# Altium PCB dsPIC33_CPU_ETH_Unit_QFN_ETH.PcbDoc
Units mm, origin at the board's own origin, x right, y up, seen from the top; angles counter-clockwise.
Board outline 83.82 x 124.46 mm, 3 copper layers (Top Layer, Internal Plane 1, Bottom Layer); 40 components, 103 nets, 313 pads, 156 vias.
Unrouted connection lines stored in the file: 4.
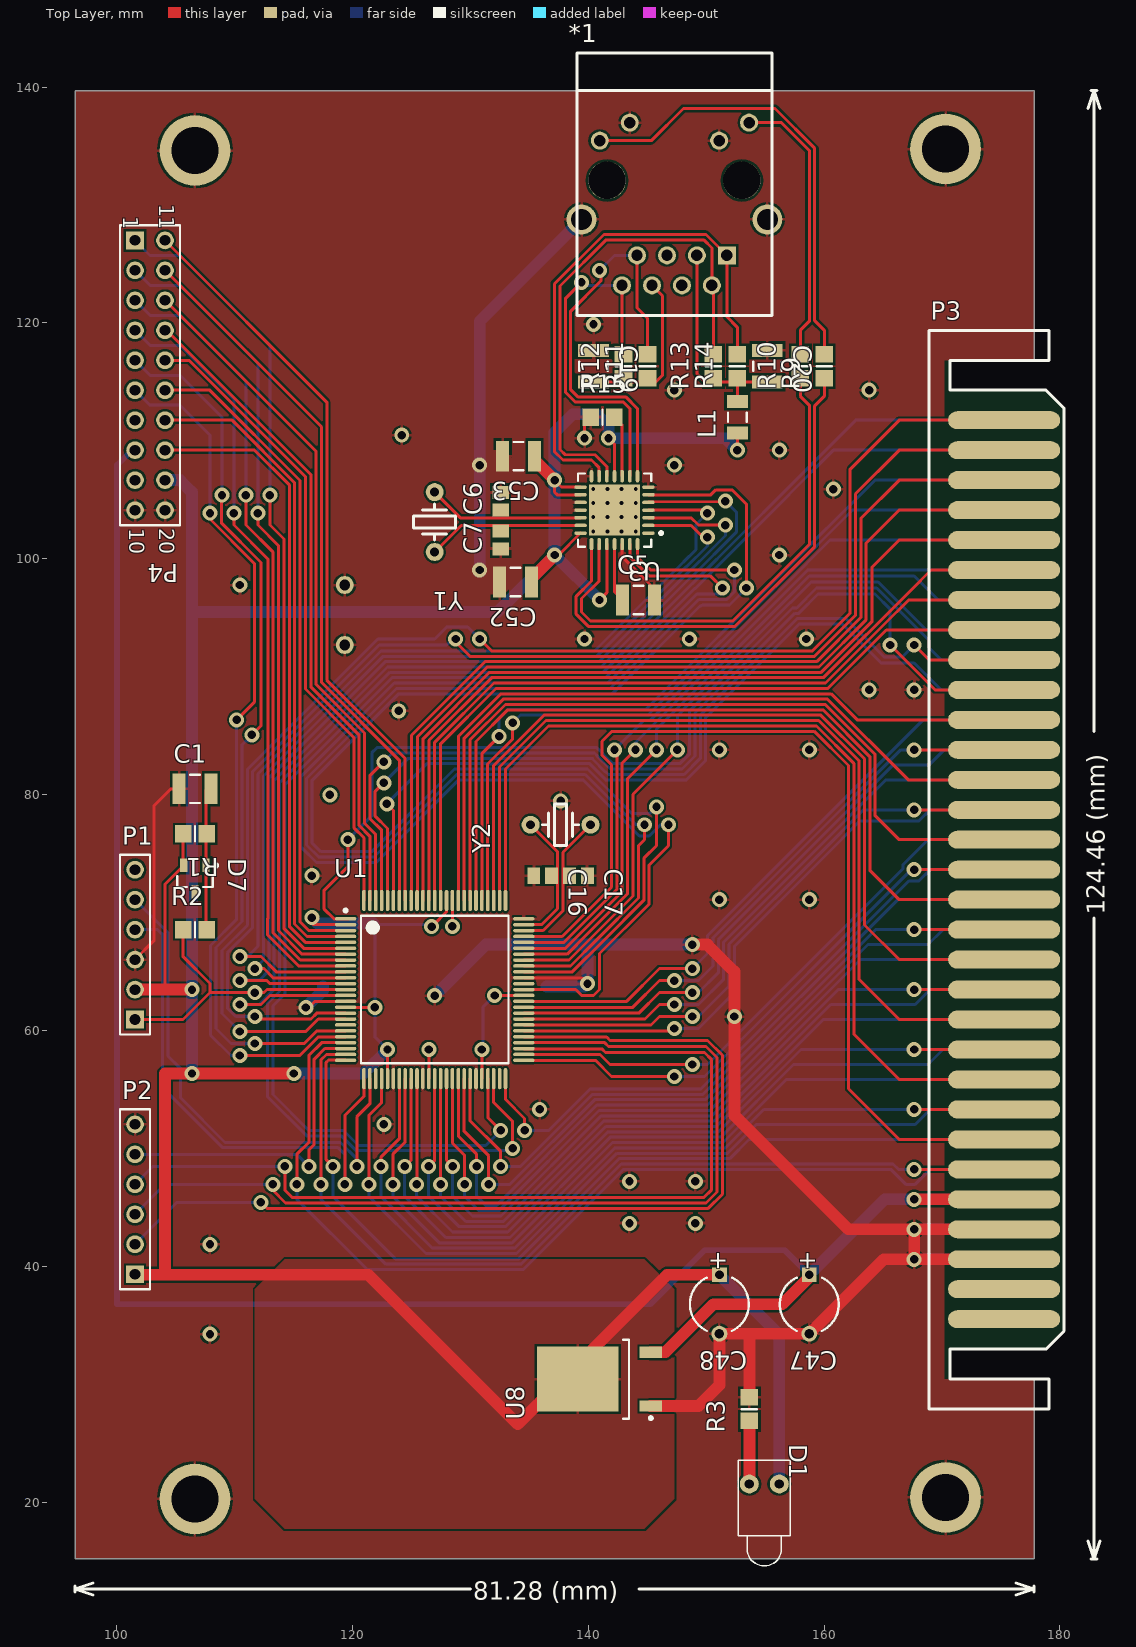
[diagram p0: Top Layer view]
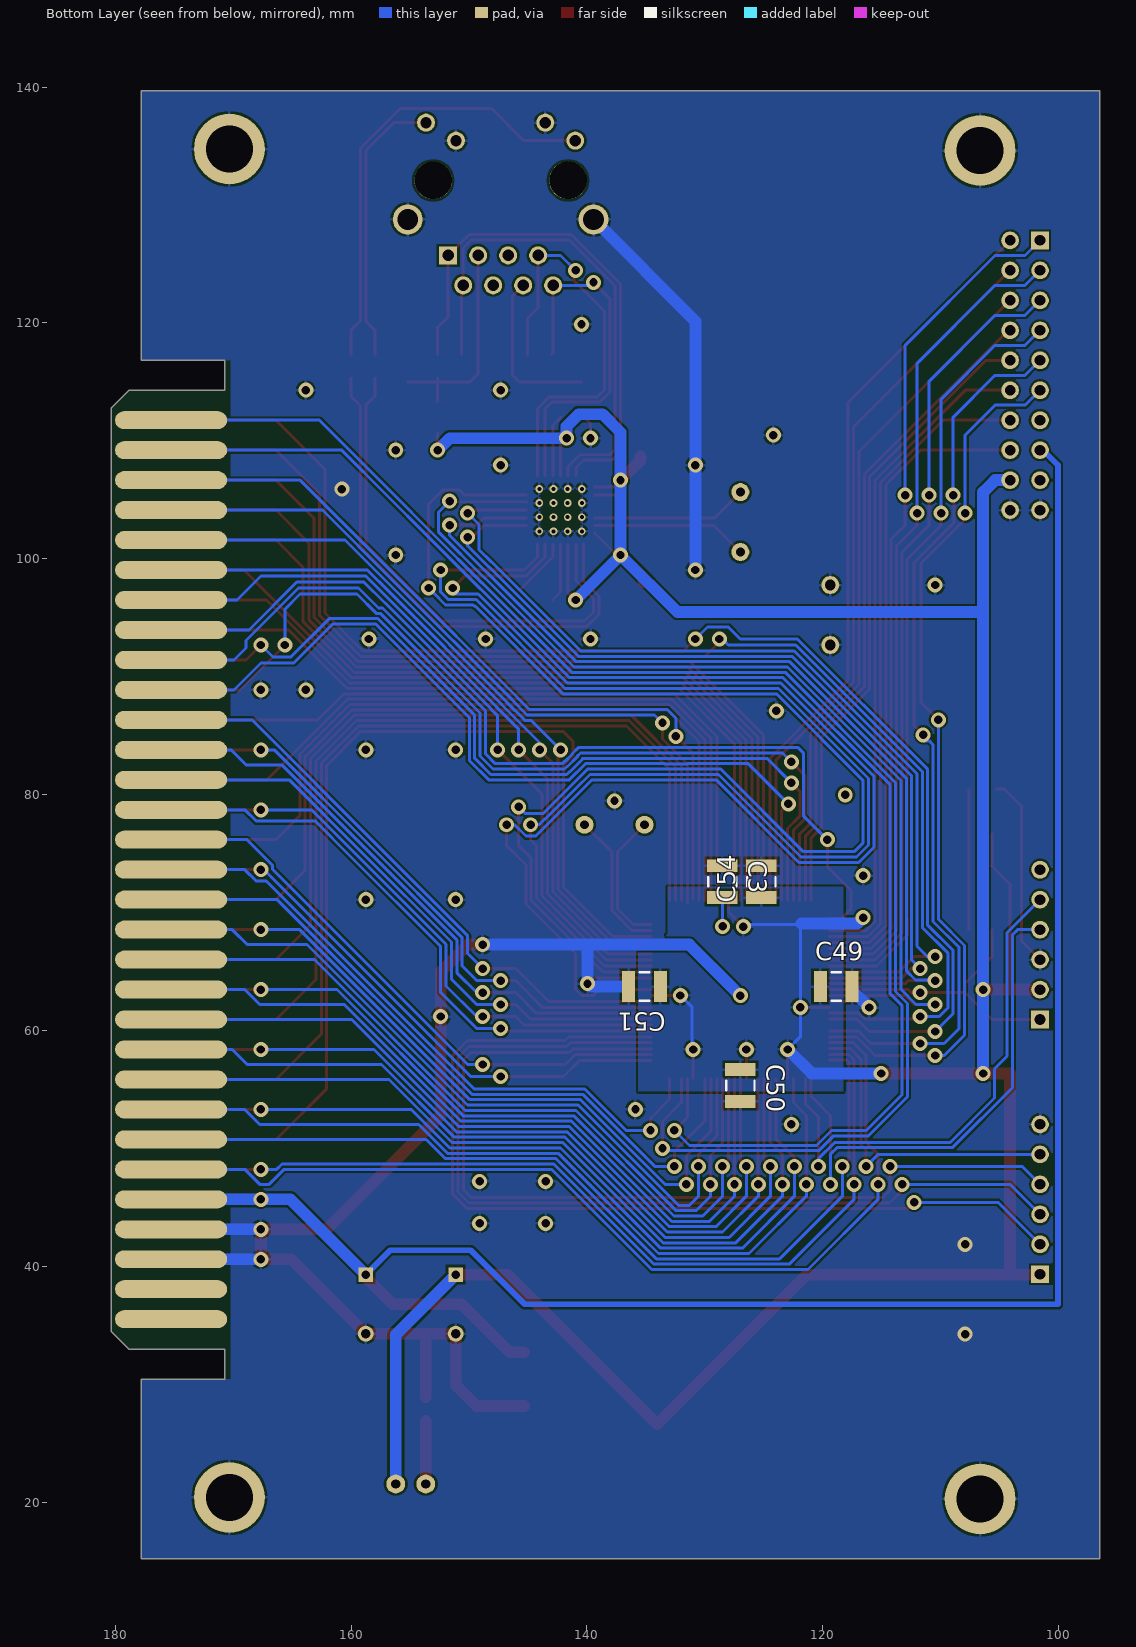
[diagram p1: Bottom Layer view, seen from below]
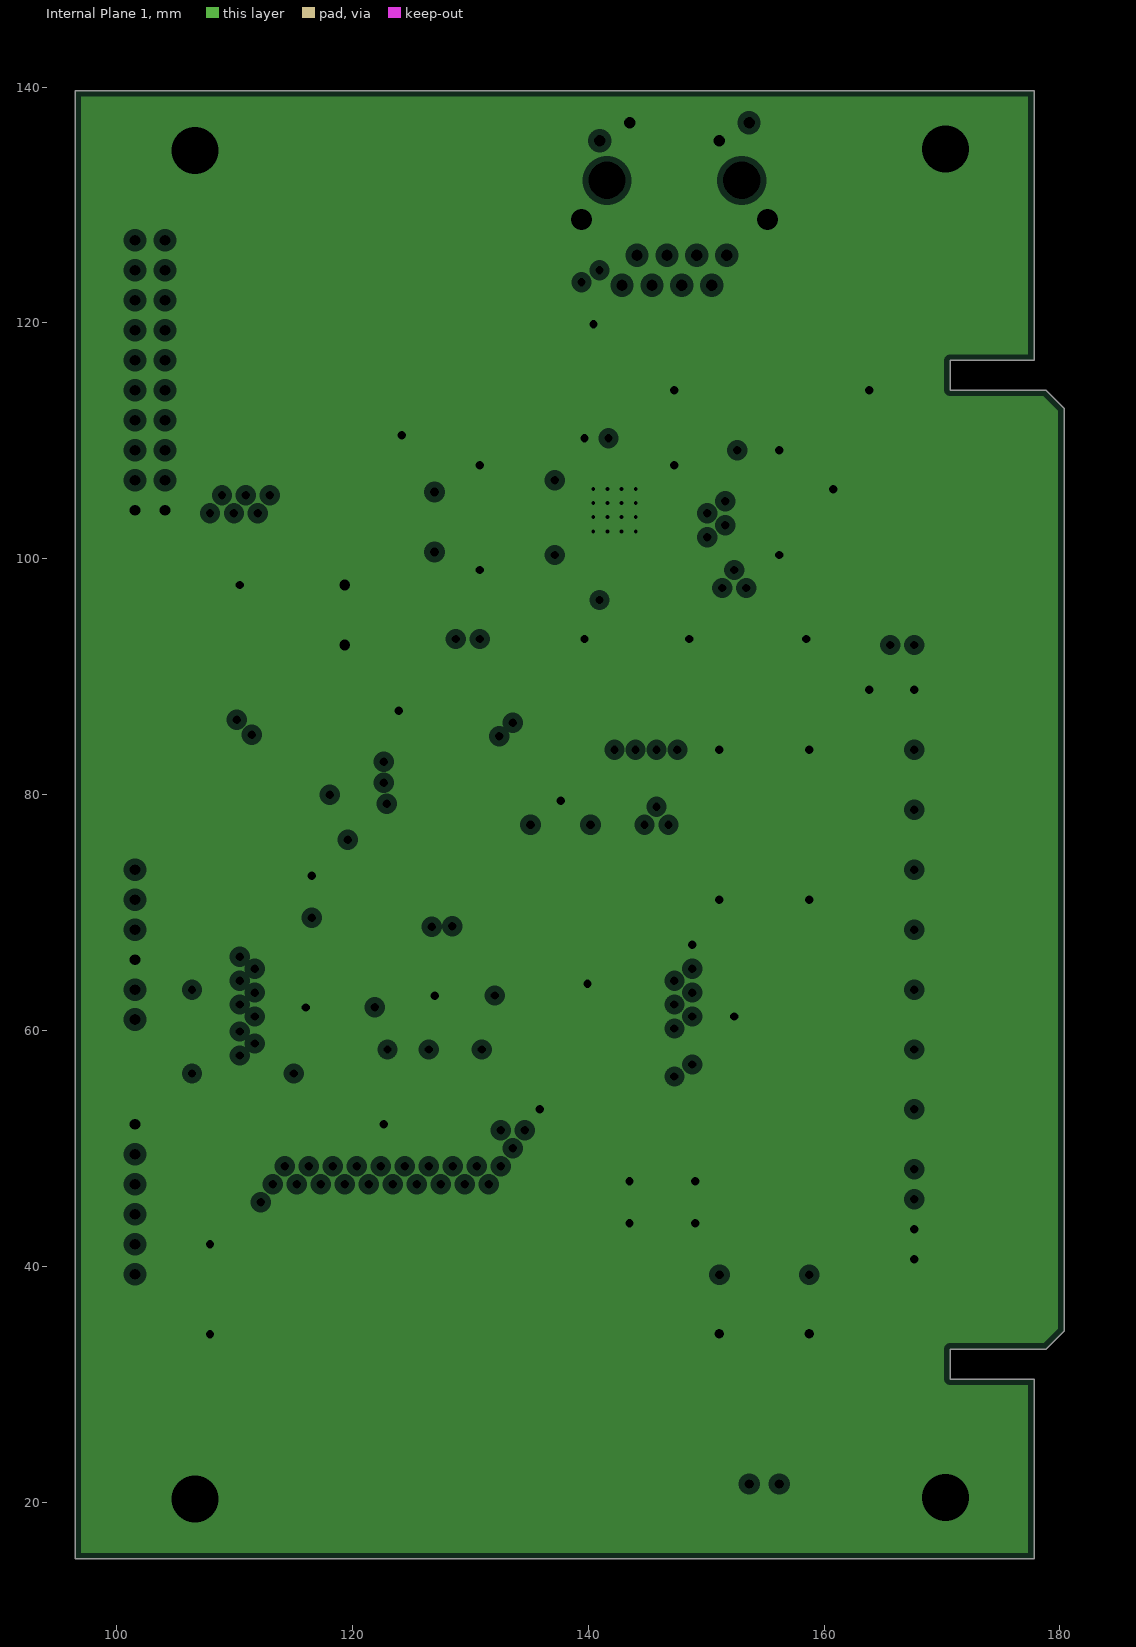
[diagram p2: Internal Plane 1, clearances drawn from the general rule]

## Layer stack, top to bottom
Top Layer: signal copper 0.0356
Dielectric: core 0.32, FR-4, Dk 4.8
Internal Plane 1: plane copper 0.0356, net GND
Dielectric: prepreg 0.32, FR-4, Dk 4.8
Bottom Layer: signal copper 0.0356

## Board outline
177.8,139.7 177.8,116.84 170.688,116.84 170.688,114.3 178.816,114.3 180.34,112.776 180.34,34.544 178.816,33.02 170.688,33.02 170.688,30.48 177.8,30.48 177.8,15.24 96.52,15.24 96.52,139.7

## Design rules (kind name [scope] priority, off if disabled: settings)
Clearance [All] p1: gap=0.2
PlaneClearance [All] p1: clearance=0.508
PlaneConnect [All] p1: planeconnectstyle=Relief reliefexpansion=0.508 reliefentries=4 reliefconductorwidth=0.254 reliefairgap=0.254
PolygonConnect [All] p1: connectstyle=Relief reliefconductorwidth=0.254 reliefentries=4 polygonreliefangle="90 Angle"
RoomDefinition dsPIC33_CPU_ETH_Unit [All] p1: confinementstyle=ConfineIn formatcopy=TRUE lockcomponents=FALSE outline 96.52,144.78 182.88,144.78 182.88,12.7 96.52,12.7
RoutingVias [All] p1: holewidth=0.711 width=1.27 viastyle="Through Hole" minholewidth=0.3 minwidth=0.8 maxholewidth=0.711 maxwidth=1.27
SMDNeckDown [All] p1: percent=200.000
SilkscreenOverComponentPads [All] p1: minsilkscreentomaskgap=0.254
SolderMaskExpansion [All] p1: expansion=0.102
Width [All] p1: maxlimit=1 minlimit=0.15 preferedwidth=0.254
25 further rules are at their usual default settings.

## Components (designator, comment, footprint, x,y, rotation, side; value= is the part's Value field where it differs from the comment)
*1 "LU1T516-43" EthernetCON 147.32,132.08 r90 top
C1 "Cap" CAPC3225L 106.68,80.518 r0 top
C3 "Cap" CAPC3225L 128.524,72.644 r270 bottom
C5 "Cap" CAPC3225L 144.272,96.52 r0 top
C6 "Cap" CAPC2012L 132.588,104.902 r90 top
C7 "Cap" CAPC2012L 132.588,101.6 r90 top
C16 "Cap" CAPC2012L 136.144,73.152 r0 top
C17 "Cap" CAPC2012L 139.192,73.152 r0 top
C19 "Cap" CAPC3225L 140.462,116.332 r270 top
C20 "Cap" CAPC3225L 155.194,116.332 r270 top
C47 "Cap Pol1" CAPPR5-5x5 158.75,36.83 r270 top
C48 "Cap Pol1" CAPPR5-5x5 151.13,36.83 r270 top
C49 "Cap" CAPC3225L 118.872,63.754 r180 bottom
C50 "Cap" CAPC3225L 127,55.372 r270 bottom
C51 "Cap" CAPC3225L 135.128,63.754 r0 bottom
C52 "Cap" CAPC3225L 133.858,98.044 r180 top
C53 "Cap" CAPC3225L 134.112,108.712 r180 top
C54 "Cap" CAPC3225L 125.222,72.644 r90 bottom
D1 "LED1" LED-1 154.94,21.59 r270 top
D7 "Diode" SOT95P240-3N 106.68,72.898 r270 top
L1 "Inductor" INDC3216AL 152.654,112.014 r90 top
P1 "Программатор" HDR1X6 101.6,60.96 r90 top
P2 "SPI" HDR1X6 101.6,39.37 r90 top
P3 "31x2 Slot" SL-62 180.34,33.02 r90 top
P4 "Header 10X2A" HDR2X10_CEN 101.6,127 r270 top
R1 "Res2" RESC2012M 106.68,76.708 r180 top
R2 "Res2" RESC2012M 106.68,68.58 r0 top
R3 "Res2" RESC2012M 153.67,27.94 r90 top
R9 "Res2" RESC2012M 160.02,116.332 r90 top
R10 "Res2" RESC2012M 157.988,116.332 r90 top
R11 "Res2" RESC2012M 145.034,116.332 r90 top
R12 "Res2" RESC2012M 143.002,116.332 r90 top
R13 "Res2" RESC2012M 150.622,116.332 r90 top
R14 "Res2" RESC2012M 152.654,116.332 r90 top
R15 "Res2" RESC2012M 141.224,112.014 r0 top
U1 "DSPIC33FJ256MC710T-I/PF" TQFP-PF100_N 127,63.5 r0 top
U3 "ENC28J60-I/ML" QFN-ML28_N 142.24,104.14 r180 top
U8 "LM1117DT-3.3" TD03B_N 140.97,30.48 r180 top
Y1 "XTAL" Quartz 127,105.664 r270 top
Y2 "XTAL" Quartz 140.208,77.47 r180 top

## Footprints (in the part's own frame and the unit in brackets; to place one, negate y for a bottom-side part, rotate by r counter-clockwise, add the part's x,y. Pads: shape width x height; smd on the part's side, far side on the other; paste and mask are expansions set on the pad)
CAPC2012L [mm] "Chip Capacitor, Body 2.0x1.3mm, IPC High Density"
  rect 1.1x1.4 smd: 1(-0.75,0) 2(0.75,0)
  body extent -1.1,-0.72 1.1,0.72, height 1.4
CAPC3225L [mm] "Chip Capacitor, Body 3.2x2.5mm, IPC High Density"
  rect 1.1x2.6 smd: 1(-1.35,0) 2(1.35,0)
  silkscreen extent -0.4,-1.2 0.4,1.2, body extent -1.7,-1.35 1.7,1.35, height 1.5
CAPPR5-5x5 [mm] "Capacitor, Electrolytic, Radial; Body 5 x 5 mm (Dia.xH typ); Pin Spacing 5 mm (typ)"
  rect 1.25x1.25 hole 0.75: 1(-2.5,0)
  round 1.35 hole 0.8: 2(2.5,0)
  silkscreen extent -2.26,-2.5 2.27,2.5
EthernetCON [mil] "Ethernet connector w/two LEDs"
  rect 60x60 hole 38: 1(-250,-175)
  round 60 hole 38: 2(-350,-125) 3(-250,-75) 4(-350,-25) 5(-250,25) 6(-350,75) 7(-250,125) 8(-350,175) 9(193,-249) 10(133,-149) 11(193,149) 12(133,249)
  round 100 hole 70: 13(-130,-310) 14(-130,310)
  round 125 hole 125 unplated: 15(0,-225) 16(0,225)
  silkscreen extent -450,-325 425,325, body extent -450,-325 425,325, height 550
HDR1X6 [mm] "Connector; Header; 6 Position"
  rect 1.5x1.5 hole 0.9: 1(0,0)
  round 1.5 hole 0.9: 2(2.54,0) 3(5.08,0) 4(7.62,0) 5(10.16,0) 6(12.7,0)
  silkscreen extent -1.27,-1.27 13.97,1.27
HDR2X10_CEN [mm] "Connector; Header; 10x2 Position"
  rect 1.5x1.5 hole 0.9: 1(0,0)
  round 1.5 hole 0.9: 2(2.54,0) 3(5.08,0) 4(7.62,0) 5(10.16,0) 6(12.7,0) 7(15.24,0) 8(17.78,0) 9(20.32,0) 10(22.86,0) 11(0,2.54) 12(2.54,2.54) 13(5.08,2.54) 14(7.62,2.54) 15(10.16,2.54) 16(12.7,2.54) 17(15.24,2.54) 18(17.78,2.54) 19(20.32,2.54) 20(22.86,2.54)
  silkscreen extent -1.27,-1.27 24.13,3.81
INDC3216AL [mm] "Chip Inductor, Body 3.2x1.6mm, IPC High Density"
  rect 1.1x1.8 smd: 1(-1.35,0) 2(1.35,0)
  silkscreen extent -0.4,-0.8 0.4,0.8, body extent -1.7,-0.9 1.7,0.9, height 0.55
LED-1 [mm] "Typical RED GaAs LED; 2 Leads"
  round 1.6 hole 0.8: 1(0,1.27) 2(0,-1.27)
  silkscreen extent -2,-2.2 6.95,2.2
QFN-ML28_N [mm] "QFN, 28-Leads, Body 6x6 mm, Pitch 0.65mm, IPC Medium Density"
  oval 1.05x0.3 smd: 1(-2.875,1.95) 2(-2.875,1.3) 3(-2.875,0.65) 4(-2.875,0) 5(-2.875,-0.65) 6(-2.875,-1.3) 7(-2.875,-1.95) 15(2.875,-1.95) 16(2.875,-1.3) 17(2.875,-0.65) 18(2.875,0) 19(2.875,0.65) 20(2.875,1.3) 21(2.875,1.95)
  oval 0.3x1.05 smd: 8(-1.95,-2.875) 9(-1.3,-2.875) 10(-0.65,-2.875) 11(0,-2.875) 12(0.65,-2.875) 13(1.3,-2.875) 14(1.95,-2.875) 22(1.95,2.875) 23(1.3,2.875) 24(0.65,2.875) 25(0,2.875) 26(-0.65,2.875) 27(-1.3,2.875) 28(-1.95,2.875)
  rect 4.3x4.3 smd: 29(0,0)
  silkscreen extent -4.08,-3.1 3.1,3.1, body extent -3.08,-3.08 3.08,3.08, height 1
Quartz [mil]
  round 60 hole 30: 1(0,0) 2(200,0)
  silkscreen extent 40,-70 160,70, body extent -100,-100 300,100, height 90
RESC2012M [mm] "Chip Resistor, Body 2.0x1.2mm, IPC Low Density"
  rect 1.4x1.5 smd: 1(-1,0) 2(1,0)
  silkscreen extent 0,-0.65 0,0.65, body extent -1.07,-0.7 1.07,0.7, height 0.7
SL-62 [mm]
  oval 1.524x9.5 smd: 1(2.54,5.08) 2(5.08,5.08) 3(7.62,5.08) 4(10.16,5.08) 5(12.7,5.08) 6(15.24,5.08) 7(17.78,5.08) 8(20.32,5.08) 9(22.86,5.08) 10(25.4,5.08) 11(27.94,5.08) 12(30.48,5.08) 13(33.02,5.08) 14(35.56,5.08) 15(38.1,5.08) 16(40.64,5.08) 17(43.18,5.08) 18(45.72,5.08) 19(48.26,5.08) 20(50.8,5.08) 21(53.34,5.08) 22(55.88,5.08) 23(58.42,5.08) 24(60.96,5.08) 25(63.5,5.08) 26(66.04,5.08) 27(68.58,5.08) 28(71.12,5.08) 29(73.66,5.08) 30(76.2,5.08) 31(78.74,5.08)
  oval 1.524x9.5 smd far side: 32(2.54,5.08) 33(5.08,5.08) 34(7.62,5.08) 35(10.16,5.08) 36(12.7,5.08) 37(15.24,5.08) 38(17.78,5.08) 39(20.32,5.08) 40(22.86,5.08) 41(25.4,5.08) 42(27.94,5.08) 43(30.48,5.08) 44(33.02,5.08) 45(35.56,5.08) 46(38.1,5.08) 47(40.64,5.08) 48(43.18,5.08) 49(45.72,5.08) 50(48.26,5.08) 51(50.8,5.08) 52(53.34,5.08) 53(55.88,5.08) 54(58.42,5.08) 55(60.96,5.08) 56(63.5,5.08) 57(66.04,5.08) 58(68.58,5.08) 59(71.12,5.08) 60(73.66,5.08) 61(76.2,5.08) 62(78.74,5.08)
  silkscreen extent -5.08,0 86.36,11.43
SOT95P240-3N [mm] "SOT23, 3-Leads, Body 2.9x1.3mm, Pitch 0.95mm, Lead Span 2.4mm, IPC Medium Density"
  rect 1.15x0.6 smd: 1(-1.125,0.95) 2(-1.125,-0.95) 3(1.125,0)
  silkscreen extent -1.25,-1.5 0.7,1.93, body extent -0.7,-1.5 0.7,1.5, height 1.14
TD03B_N [mm] "D-PAK, 4-Leads, Body 6.1x6.6mm, Pitch 2.29mm, Lead Span 9.7mm, IPC Medium Density"
  rect 1.9x0.95 smd: 1(-4.35,2.28) 3(-4.35,-2.28)
  rect 6.9x5.5 smd: 4(1.85,0)
  silkscreen extent -4.47,-3.35 -2,3.43, body extent -2.5,-3.35 3.7,3.35, height 2.38
TQFP-PF100_N [mm] "Thin QFP, 100-Leads, Body 14x14mm, Pitch 0.5mm, IPC Medium Density"
  oval 1.8x0.3 smd: 1(-7.55,6) 2(-7.55,5.5) 3(-7.55,5) 4(-7.55,4.5) 5(-7.55,4) 6(-7.55,3.5) 7(-7.55,3) 8(-7.55,2.5) 9(-7.55,2) 10(-7.55,1.5) 11(-7.55,1) 12(-7.55,0.5) 13(-7.55,0) 14(-7.55,-0.5) 15(-7.55,-1) 16(-7.55,-1.5) 17(-7.55,-2) 18(-7.55,-2.5) 19(-7.55,-3) 20(-7.55,-3.5) 21(-7.55,-4) 22(-7.55,-4.5) 23(-7.55,-5) 24(-7.55,-5.5) 25(-7.55,-6) 51(7.55,-6) 52(7.55,-5.5) 53(7.55,-5) 54(7.55,-4.5) 55(7.55,-4) 56(7.55,-3.5) 57(7.55,-3) 58(7.55,-2.5) 59(7.55,-2) 60(7.55,-1.5) 61(7.55,-1) 62(7.55,-0.5) 63(7.55,0) 64(7.55,0.5) 65(7.55,1) 66(7.55,1.5) 67(7.55,2) 68(7.55,2.5) 69(7.55,3) 70(7.55,3.5) 71(7.55,4) 72(7.55,4.5) 73(7.55,5) 74(7.55,5.5) 75(7.55,6)
  oval 0.3x1.8 smd: 26(-6,-7.55) 27(-5.5,-7.55) 28(-5,-7.55) 29(-4.5,-7.55) 30(-4,-7.55) 31(-3.5,-7.55) 32(-3,-7.55) 33(-2.5,-7.55) 34(-2,-7.55) 35(-1.5,-7.55) 36(-1,-7.55) 37(-0.5,-7.55) 38(0,-7.55) 39(0.5,-7.55) 40(1,-7.55) 41(1.5,-7.55) 42(2,-7.55) 43(2.5,-7.55) 44(3,-7.55) 45(3.5,-7.55) 46(4,-7.55) 47(4.5,-7.55) 48(5,-7.55) 49(5.5,-7.55) 50(6,-7.55) 76(6,7.55) 77(5.5,7.55) 78(5,7.55) 79(4.5,7.55) 80(4,7.55) 81(3.5,7.55) 82(3,7.55) 83(2.5,7.55) 84(2,7.55) 85(1.5,7.55) 86(1,7.55) 87(0.5,7.55) 88(0,7.55) 89(-0.5,7.55) 90(-1,7.55) 91(-1.5,7.55) 92(-2,7.55) 93(-2.5,7.55) 94(-3,7.55) 95(-3.5,7.55) 96(-4,7.55) 97(-4.5,7.55) 98(-5,7.55) 99(-5.5,7.55) 100(-6,7.55)
  silkscreen extent -7.67,-6.25 6.25,6.82, body extent -7,-7 7,7, height 1.2

## Part data
C1 C3 C5 C6 C7 C16 C17 C19 C20 C49 C50 C51 C52 C53 C54: "Capacitor"
C47 C48: "Polarized Capacitor (Radial)"
D1: "Typical RED GaAs LED"
D7: "Default Diode"
P1 P2: library part "Header 6", "Header, 6-Pin"
P4: "Header, 10-Pin, Dual row"
R1 R2 R3 R9 R10 R11 R12 R13 R14 R15: "Resistor"
U1: "High-Performance 16-bit Digital Signal Controller, 256 KB Flash, 30 KB RAM, 100-Pin TQFP, Industrial Temperature, Tape and Reel"
U3: "Stand-Alone Ethernet Controller with SPI Interface, 28-Pin QFN, Industrial Temperature"
U8: "800mA Low-Dropout Linear Regulator"
Y1 Y2: "Crystal Oscillator"

## Free pads (board coordinates)
  round 6 hole 4: 0(106.68,20.32) 0(106.68,134.62) 0(170.307,20.447) 0(170.307,134.747)
  round 1.524 hole 0.9: 2(119.38,92.71) 3(119.38,97.79)

## Via types
v1: diameter 1.27, hole 0.711, Top Layer to Bottom Layer, 140 vias
v2: diameter 0.66, hole 0.33, Top Layer to Bottom Layer, tented top, 16 vias

## Nets (pads, with @x,y where several pads share a name; then routed paths per layer and width w, separated by ;. In a path a pad name is that pad's centre, name@x,y a point inside that pad or via, vN(x,y) a via of type N, cw(c..) or ccw(c..) an arc to the next point about the centre after c; other vN are vias at no path point)
+5: C47.1 P3.5 P3.36 P4.8 U8.3 | length 177.6
  Top Layer w1: U8.3 146.552,32.76 150.622,36.83 151.13,36.83 156.464,36.83 158.75,39.116 C47.1 ; v1(167.64,45.72) P3.5
  Bottom Layer w0.5: P4.8 101.346,109.22 100.076,107.95 100.076,36.83 145.288,36.83 149.86,41.402 156.678,41.402 C47.1
  Bottom Layer w1: C47.1 165.14,45.72 v1(167.64,45.72) P3.36
+30: P3.1 P3.2 P3.32 P3.33
A0: P4.1 U1.6 | length 71
  Top Layer w0.254: v1(113.03,105.41) 113.03,102.87 114.217,101.683 114.217,68.977 114.208,68.968 114.208,68.687 115.895,67 U1.6
  Bottom Layer w0.254: P4.1 102.87,125.73 105.41,125.73 113.03,118.11 v1(113.03,105.41)
DB0: P4.11 U1.93 | length 64.4
  Top Layer w0.254: P4.11 117.856,113.284 117.856,89.726 124.5,83.082 U1.93 U1.93@124.523,71.073
DB1: P4.12 U1.94 | length 61.7
  Top Layer w0.254: P4.12 117.402,111.198 117.402,89.538 124,82.94 U1.94 U1.94@124.023,71.073
DB2: P4.13 U1.98 | length 58.3
  Top Layer w0.254: P4.13 116.948,109.112 116.948,89.35 121.05,85.248 121.05,77.592 122,76.642 U1.98
DB3: P4.14 U1.99 | length 55.6
  Top Layer w0.254: P4.14 104.274,119.38 116.494,107.16 116.494,89.162 120.596,85.06 120.596,77.404 121.5,76.5 U1.99
DB4: P4.15 U1.100 | length 54
  Top Layer w0.254: P4.15 106.172,116.84 116.04,106.972 116.04,88.974 120.142,84.872 120.142,77.216 121,76.358 U1.100
DB5: P4.16 U1.3 | length 56.2
  Top Layer w0.254: P4.16 107.936,114.3 115.579,106.657 115.579,69.243 116.322,68.5 U1.3
DB6: P4.17 U1.4 | length 55.4
  Top Layer w0.254: P4.17 109.834,111.76 115.125,106.469 115.125,69.055 116.179,68 U1.4
DB7: P4.18 U1.5 | length 54.5
  Top Layer w0.254: P4.18 111.732,109.22 114.671,106.281 114.671,68.866 116.037,67.5 U1.5
DISPE: P4.3 U1.8 | length 67.1
  Top Layer w0.254: v1(110.998,105.41) 110.998,102.87 113.309,100.559 113.309,69.353 113.3,69.344 113.3,68.311 115.611,66 U1.8
  Bottom Layer w0.254: P4.3 102.87,120.65 105.41,120.65 110.998,115.062 v1(110.998,105.41)
DISPRESET: P4.4 U1.9 | length 65.1
  Top Layer w0.254: v1(109.982,103.886) 109.982,102.87 112.855,99.997 112.855,69.541 112.846,69.532 112.846,68.123 115.469,65.5 U1.9
  Bottom Layer w0.254: P4.4 102.87,118.11 105.41,118.11 109.982,113.538 v1(109.982,103.886)
DRV_DIR_A: P3.37 U1.22 | length 83.2
  Top Layer w0.254: v1(115.316,46.99) 115.316,49.53 116.332,50.546 116.332,57.912 117.42,59 U1.22
  Bottom Layer w0.254: v1(115.316,46.99) 115.316,45.72 121.272,39.764 134.506,39.764 143.002,48.26 165.664,48.26 166.934,46.99 167.73,46.99 169,48.26 P3.37
DRV_DIR_B: P3.39 U1.29 | length 71.3
  Top Layer w0.254: v1(121.412,46.99) 121.412,52.832 122.5,53.92 U1.29
  Bottom Layer w0.254: v1(121.412,46.99) 121.412,45.974 126.26,41.126 133.942,41.126 142.438,49.622 151.815,49.622 154.263,52.07 167.73,52.07 169,53.34 P3.39
DRV_DIR_C: P3.41 U1.34 | length 69
  Top Layer w0.254: v1(124.46,48.514) 125,49.054 U1.34
  Bottom Layer w0.254: v1(124.46,48.514) 124.46,45.974 127.946,42.488 133.378,42.488 141.874,50.984 151.25,50.984 157.416,57.15 168.805,57.15 170.075,58.42 P3.41
DRV_DIR_D: P3.43 U1.39 | length 66.8
  Top Layer w0.254: v1(127.5,46.99) U1.39
  Bottom Layer w0.254: v1(127.5,46.99) 127.5,45.982 129.632,43.85 132.814,43.85 141.31,52.346 150.686,52.346 160.57,62.23 167.73,62.23 169,63.5 P3.43
DRV_DIR_E: P3.45 U1.42 | length 65.3
  Top Layer w0.254: U1.42 129,51.086 130.556,49.53 v1(130.556,48.514)
  Bottom Layer w0.254: v1(130.556,48.514) 130.556,45.974 131.318,45.212 132.249,45.212 140.745,53.708 150.122,53.708 163.724,67.31 167.386,67.31 168.805,67.31 170.075,68.58 P3.45
DRV_DIR_F: P3.47 U1.50 | length 54.9
  Top Layer w0.254: U1.50 133,54.198 134.62,52.578 v1(134.62,51.562)
  Bottom Layer w0.254: v1(134.62,51.562) 136.673,51.562 140.181,55.07 149.558,55.07 167.186,72.698 168.038,72.698 169,73.66 P3.47
DRV_DIR_G: P3.49 U1.56 | length 50.8
  Top Layer w0.254: U1.56 143.566,60 147.122,60 v1(147.32,60.198)
  Bottom Layer w0.254: v1(147.32,60.198) 149.352,60.198 152.4,63.246 152.4,67.148 160.082,74.83 163.03,77.778 168.038,77.778 169,78.74 P3.49
DRV_DIR_H: P3.51 U1.59 | length 51.6
  Top Layer w0.254: U1.59 144.304,61.5 146.05,63.246 v1(148.844,63.246)
  Bottom Layer w0.254: v1(148.844,63.246) 149.352,63.246 151.038,64.932 151.038,67.712 158.72,75.394 165.876,82.55 168.91,82.55 170.18,83.82 P3.51
DRV_ENA_A: P3.38 U1.25 | length 76.6
  Top Layer w0.254: v1(118.364,48.514) 117.802,49.076 117.802,57.336 117.989,57.523 119.427,57.523 U1.25
  Bottom Layer w0.254: v1(118.364,48.514) 118.364,45.974 123.666,40.672 134.13,40.672 142.626,49.168 152.003,49.168 153.635,50.8 168.82,50.8 P3.38
DRV_ENA_B: P3.40 U1.33 | length 69.6
  Top Layer w0.254: v1(123.444,46.99) 123.444,49.53 124.5,50.586 U1.33
  Bottom Layer w0.254: v1(123.444,46.99) 123.444,45.974 127.384,42.034 133.566,42.034 142.062,50.53 151.439,50.53 156.789,55.88 168.82,55.88 P3.40
DRV_ENA_C: P3.42 U1.38 | length 67.3
  Top Layer w0.254: v1(126.492,48.514) 127,49.022 U1.38
  Bottom Layer w0.254: v1(126.492,48.514) 126.492,45.974 129.07,43.396 133.002,43.396 141.498,51.892 150.874,51.892 159.942,60.96 168.177,60.96 P3.42
DRV_ENA_D: P3.44 U1.41 | length 65.4
  Top Layer w0.254: U1.41 128.5,50.48 129.54,49.44 v1(129.54,46.99)
  Bottom Layer w0.254: v1(129.54,46.99) 129.54,45.974 130.756,44.758 132.437,44.758 140.933,53.254 150.31,53.254 163.096,66.04 P3.44
DRV_ENA_E: P3.46 U1.44 | length 60.5
  Top Layer w0.254: U1.44 130,52.372 132.588,49.784 v1(132.588,48.514)
  Bottom Layer w0.254: v1(132.588,48.514) 134.267,48.514 140.369,54.616 149.746,54.616 166.25,71.12 168.177,71.12 P3.46
DRV_ENA_F: P3.48 U1.52 | length 49.4
  Top Layer w0.254: U1.52 141.002,58 141.852,57.15 148.336,57.15 148.59,56.896 v1(148.844,57.15)
  Bottom Layer w0.254: v1(148.844,57.15) 150.114,57.15 154.432,61.468 166.678,73.714 166.678,74.058 168.82,76.2 P3.48
DRV_ENA_G: P3.50 U1.58 | length 51
  Top Layer w0.254: U1.58 144.82,61 146.05,62.23 v1(147.32,62.23)
  Bottom Layer w0.254: v1(147.32,62.23) 149.352,62.23 151.492,64.37 151.492,67.524 159.174,75.206 165.248,81.28 P3.50
DRV_ENA_H: P3.52 U1.61 | length 51.5
  Top Layer w0.254: U1.61 143.272,62.5 146.05,65.278 v1(148.844,65.278)
  Bottom Layer w0.254: v1(148.844,65.278) 150.114,66.548 150.114,68.072 157.812,75.77 168.402,86.36 P3.52
DRV_HOME_A: P3.6 U1.24 | length 78
  Top Layer w0.254: v1(117.348,46.99) 117.348,52.07 117.348,57.524 117.824,58 U1.24 ; v1(167.64,48.26) P3.6
  Bottom Layer w0.254: v1(117.348,46.99) 117.348,45.72 122.85,40.218 134.318,40.218 142.814,48.714 165.852,48.714 166.306,48.26 v1(167.64,48.26)
DRV_HOME_B: P3.8 U1.32 | length 70.2
  Top Layer w0.254: v1(122.428,48.514) 122.428,49.276 124,50.848 U1.32 ; v1(167.64,53.34) P3.8
  Bottom Layer w0.254: v1(122.428,48.514) 122.428,45.974 126.822,41.58 133.754,41.58 142.25,50.076 151.627,50.076 154.891,53.34 164.79,53.34 v1(167.64,53.34)
DRV_HOME_C: P3.10 U1.35 | length 67.4
  Top Layer w0.254: v1(125.476,46.99) 125.476,47.498 125.5,47.522 125.5,50.824 U1.35 ; v1(167.64,58.42) P3.10
  Bottom Layer w0.254: v1(125.476,46.99) 125.476,45.974 128.508,42.942 133.19,42.942 141.686,51.438 151.062,51.438 158.044,58.42 v1(167.64,58.42)
DRV_HOME_D: P3.12 U1.40 | length 65.6
  Top Layer w0.254: U1.40 128,49.038 v1(128.524,48.514) ; v1(167.64,63.5) P3.12
  Bottom Layer w0.254: v1(128.524,48.514) 128.524,45.974 130.194,44.304 132.625,44.304 141.121,52.8 150.498,52.8 161.198,63.5 v1(167.64,63.5)
DRV_HOME_E: P3.14 U1.43 | length 63
  Top Layer w0.254: U1.43 129.5,51.482 131.572,49.41 v1(131.572,46.99) ; v1(167.64,68.58) P3.14
  Bottom Layer w0.254: v1(131.572,46.99) 133.385,46.99 140.557,54.162 149.934,54.162 164.352,68.58 167.278,68.58 167.64,68.942 v1(167.64,68.58)
DRV_HOME_F: P3.16 U1.51 | length 48.6
  Top Layer w0.254: U1.51 140.62,57.5 141.986,56.134 147.066,56.134 v1@147.32,55.88 ; v1(167.64,73.66) P3.16
  Bottom Layer w0.254: v1(147.32,56.134) 149.86,56.134 v1@167.513,73.787 ; v1@167.602,73.698 v1(167.64,73.66)
DRV_HOME_G: P3.18 U1.57 | length 50.3
  Top Layer w0.254: U1.57 145.336,60.5 146.05,61.214 v1(148.844,61.214) ; v1(167.64,78.74) P3.18
  Bottom Layer w0.254: v1(148.844,61.214) 149.352,61.214 151.946,63.808 151.946,67.336 159.628,75.018 163.35,78.74 v1(167.64,78.74)
DRV_HOME_H: P3.20 U1.60 | length 51.2
  Top Layer w0.254: U1.60 143.788,62 146.05,64.262 v1(147.32,64.262) ; v1(167.64,83.82) P3.20
  Bottom Layer w0.254: v1(147.32,64.262) 149.352,64.262 150.584,65.494 150.584,67.9 158.266,75.582 166.504,83.82 v1(167.64,83.82)
DRV_MS1: P3.23 U1.96 | length 74.6
  Top Layer w0.254: v1(122.682,81.026) 121.958,80.302 121.958,78.194 123,77.152 U1.96 ; v1(167.64,92.71) 168.91,91.44 P3.23
  Bottom Layer w0.254: v1(122.682,81.026) 124.752,83.096 131.683,83.096 131.686,83.093 133.236,83.093 133.239,83.096 140.362,83.096 140.37,83.088 140.37,83.045 141.465,81.95 141.508,81.95 141.724,81.734 148.148,81.734 149.517,83.103 149.517,86.75 157.708,94.942 158.054,94.942 161.852,94.942 165.1,91.694 166.624,91.694 v1(167.64,92.71)
DRV_MS2: P3.22 U1.97 | length 79.6
  Top Layer w0.254: U1.97 122.5,77.01 121.504,78.006 121.504,81.626 v1(122.682,82.804) ; v1(165.608,92.71) 169.418,88.9 P3.22
  Bottom Layer w0.254: v1(122.682,82.804) 123.428,83.55 131.871,83.55 131.874,83.547 133.048,83.547 133.051,83.55 140.55,83.55 140.824,83.276 140.824,83.233 141.653,82.404 141.696,82.404 141.912,82.188 147.96,82.188 149.063,83.291 149.063,86.938 157.52,95.396 157.866,95.396 159.498,97.028 164.324,97.028 165.608,95.744 v1(165.608,92.71)
DRV_RESET: P3.54 U1.1 | length 82.8
  Top Layer w0.254: U1.1@119.634,69.5 118.46,69.5 117.602,70.358 117.602,71.882 119.634,73.914 v1(119.634,76.2)
  Bottom Layer w0.254: v1(119.634,76.2) 121.666,78.232 121.666,83.566 122.104,84.004 132.06,84.004 132.063,84.001 132.859,84.001 132.862,84.004 140.738,84.004 141.278,83.464 141.278,83.422 141.842,82.858 141.884,82.858 142.1,82.642 147.772,82.642 148.609,83.479 148.609,87.098 148.609,87.127 157.332,95.85 157.36,95.85 157.678,95.85 159.364,97.536 164.458,97.536 168.91,93.084 168.91,92.456 169.926,91.44 P3.54
DRV_SLEEP: P3.53 U1.95 | length 73.2
  Top Layer w0.254: v1(122.936,79.248) 123.5,78.684 U1.95
  Bottom Layer w0.254: v1@122.809,79.375 v1@123.317,79.375 ; v1(122.936,79.248) 126.33,82.642 131.495,82.642 131.498,82.639 133.424,82.639 133.427,82.642 140.131,82.642 141.493,81.28 148.336,81.28 149.971,82.915 149.971,86.562 157.896,94.488 161.544,94.488 164.846,91.186 167.64,91.186 169.926,88.9 P3.53
DRV_STEP_A: P3.7 U1.72 | length 86.7
  Top Layer w0.254: U1.72 137.808,68 138.554,68.746 141.986,72.178 141.986,82.55 141.186,83.35 141.186,84.544 142.034,85.392 159.168,85.392 162.068,82.492 162.068,55.102 166.37,50.8 P3.7
DRV_STEP_B: P3.9 U1.76 | length 80.8
  Top Layer w0.254: U1.76 133,82.2 136.646,85.846 159.356,85.846 162.522,82.68 162.522,59.728 166.37,55.88 P3.9
DRV_STEP_C: P3.11 U1.77 | length 77
  Top Layer w0.254: U1.77 132.5,82.357 136.443,86.3 159.544,86.3 162.976,82.868 162.976,64.354 166.37,60.96 P3.11
DRV_STEP_D: P3.13 U1.78 | length 73.3
  Top Layer w0.254: U1.78 132,82.499 136.255,86.754 159.732,86.754 163.43,83.056 163.43,68.98 166.37,66.04 P3.13
DRV_STEP_E: P3.15 U1.81 | length 71.7
  Top Layer w0.254: U1.81 130.5,84.526 133.182,87.208 159.92,87.208 163.884,83.244 163.884,73.606 166.37,71.12 P3.15
DRV_STEP_F: P3.17 U1.82 | length 67.9
  Top Layer w0.254: U1.82 130,84.668 132.994,87.662 160.108,87.662 164.338,83.432 164.338,78.232 166.37,76.2 P3.17
DRV_STEP_G: P3.19 U1.83 | length 63.7
  Top Layer w0.254: U1.83 129.5,84.81 132.806,88.116 160.296,88.116 167.132,81.28 P3.19
DRV_STEP_H: P3.21 U1.84 | length 62.6
  Top Layer w0.254: U1.84 129,84.952 132.618,88.57 160.604,88.57 162.814,86.36 P3.21
E1: P4.6 U1.21 | length 74.8
  Top Layer w0.254: v1(107.95,103.886) 107.817,103.753 107.817,103.511 111.709,99.619 111.709,87.855 v1(110.214,86.36) ; v1(110.49,57.912) 115.57,57.912 117.158,59.5 U1.21
  Bottom Layer w0.254: P4.6 102.87,113.03 105.41,113.03 107.95,110.49 v1(107.95,103.886) ; v1(110.214,86.36) 110.214,69.454 108.004,67.244 108.004,59.636 109.728,57.912 v1(110.49,57.912)
E2: P4.5 U1.20 | length 76.3
  Top Layer w0.254: v1(108.966,105.41) 108.912,105.356 108.912,103.058 112.268,99.702 112.268,85.852 v1(111.506,85.09) ; v1(111.76,58.928) 115.944,58.928 117.016,60 U1.20
  Bottom Layer w0.254: P4.5 102.87,115.57 105.41,115.57 108.966,112.014 v1(108.966,105.41) ; v1(111.76,58.928) 109.728,58.928 108.458,60.198 108.458,67.056 110.668,69.266 110.668,84.252 110.998,84.582 111.506,84.582 v1@111.76,84.836
ESPI_SCK: U1.10 U3.4 | length 79.6
  Top Layer w0.254: v1(110.49,66.294) 112.268,66.294 113.562,65 U1.10 ; U3.4 149.86,104.14 v1(150.114,103.886)
  Bottom Layer w0.254: v1(110.49,66.294) 111.15,66.294 112.03,67.174 112.03,81.79 122.442,92.202 140.54,92.202 148.036,99.698 148.09,99.752 148.118,99.752 149.152,100.786 149.152,102.924 v1(150.114,103.886)
ESPI_SDI: U1.11 U3.2 | length 76.5
  Top Layer w0.254: v1(111.76,65.278) 112.522,65.278 113.3,64.5 U1.11 ; U3.2 148.74,102.84 149.726,101.854 v1(150.114,101.854)
  Bottom Layer w0.254: v1(111.76,65.278) 112.484,66.002 112.484,81.602 122.63,91.748 140.728,91.748 148.224,99.244 148.278,99.298 148.306,99.298 150.114,101.106 v1(150.114,101.854)
ESPI_SDO: U1.12 U3.3 | length 83.1
  Top Layer w0.254: v1(110.49,64.262) 112.768,64.262 113.03,64 U1.12 ; U3.3 148.732,103.49 149.352,102.87 v1(151.638,102.87)
  Bottom Layer w0.254: v1(110.49,64.262) 110.544,64.316 112.158,64.316 112.938,65.096 112.938,81.414 122.818,91.294 140.916,91.294 148.412,98.79 148.466,98.844 148.494,98.844 150.542,100.892 151.638,101.988 v1(151.638,102.87)
ESPI_SS: U1.14 U3.5 | length 87.5
  Top Layer w0.254: v1(110.49,62.23) 112.268,62.23 113.038,63 U1.14 ; U3.5 145.173,104.848 v1@151.274,104.848
  Bottom Layer w0.254: v1(110.49,62.23) 112.104,62.23 113.392,63.518 113.392,81.226 123.006,90.84 141.104,90.84 148.6,98.336 148.654,98.39 148.682,98.39 152.6,102.308 152.6,102.576 152.6,103.94 v1(151.638,104.902)
ETH_INT: U1.67 U3.28 | length 112.5
  Top Layer w0.254: U1.67 138.518,65.5 140.824,67.806 144.272,71.254 144.272,75.692 144.78,76.2 144.78,76.976 v1(144.78,77.47) ; U3.28 144.19,100.172 145.302,99.06 152.146,99.06 v1@152.4,98.806
  Bottom Layer w0.254: v1(144.78,77.47) 144.062,77.47 143.554,77.978 143.511,77.978 140.901,80.588 139.755,81.734 133.803,81.734 133.8,81.731 131.122,81.731 131.119,81.734 128.858,81.734 121.854,74.73 117.16,74.73 116.132,75.758 116.132,81.398 123.758,89.024 141.856,89.024 149.39,96.558 151.766,96.558 152.4,97.192 v1(152.4,99.06)
ETH_RESET: U1.66 U3.6 | length 121
  Top Layer w0.254: U1.66 138.66,65 141.278,67.618 144.726,71.066 144.726,74.248 144.726,74.622 145.796,75.692 v1(145.796,78.994) ; U3.6 150.398,105.44 150.822,105.864 152.2,105.864 153.416,104.648 153.416,98.044 153.67,97.79 v1(153.416,97.536) v1@153.162,97.536
  Bottom Layer w0.254: v1(145.796,78.994) 145.234,78.432 143.699,78.432 141.089,81.042 139.943,82.188 133.615,82.188 133.612,82.185 131.31,82.185 131.307,82.188 128.67,82.188 121.666,75.184 117.348,75.184 116.586,75.946 116.586,81.209 123.947,88.57 142.047,88.57 149.479,96.002 149.582,96.002 149.684,96.104 151.984,96.104 153.04,97.16 153.416,97.16 153.416,97.282 v1@153.162,97.536
GND: *1.10 *1.11 *1.13 *1.14 C1.1 C3.1 C5.2 C6.2 C7.1 C16.1 C17.2 C19.1 C20.1 C47.2 C48.2 C49.2 C50.2 C51.2 C52.2 C53.2 C54.2 P1.3 P2.6 P3.3 P3.4 P3.34 P3.35 P4.10 P4.20 pad.0 pad.2 pad.3 R3.2 R15.1 U1.15 U1.31 U1.36 U1.45 U1.65 U1.75 U3.7 U3.14 U3.17 U3.18 U3.26 U3.29 U8.1 | length 203.5
  Top Layer w0.254: P1.3 103.19,67.63 103.19,79.06 104.648,80.518 C1.1 ; v1(116.078,61.976) 116.332,61.722 116.332,61.976 116.856,62.5 U1.15 ; U1.65 139.462,64.5 v1(139.954,64.008) ; v1(139.7,110.236) 139.7,111.49 R15.1 ; U3.26 142.89,100.188 C5.2@145.622,97.456
  Top Layer w1: U8.1 149.358,28.2 151.13,29.972 C48.2 153.67,34.33 ; v1(148.844,67.31) 150.114,67.31 152.4,65.024 v1(152.4,61.214) 152.4,52.832 162.052,43.18 v1(167.64,43.18) ; R3.2 153.67,34.33 ; P3.3 v1(167.64,40.64) ; P3.4 v1(167.64,43.18) ; 153.67,34.33 C47.2 165.06,40.64 v1(167.64,40.64) ; v1(167.64,40.64) v1(167.64,43.18)
  Bottom Layer w1: v1@116.172,61.882 116.172,62.07 117.522,63.42 C49.2 ; v1(127,62.992) 131.318,67.31 139.954,67.31 ; v1(130.81,99.06) v1(130.81,107.95) 130.81,120.142 *1.14 ; C51.2 139.7,63.754 v1(139.954,64.008) 139.954,67.31 ; v1(148.844,67.31) 139.954,67.31 ; v1(167.64,40.64) P3.34 ; v1(167.64,43.18) P3.35
  other v1: 107.95,34.29 107.95,41.91 143.51,43.688 149.098,43.688 143.51,47.244 149.098,47.244 122.682,52.07 135.89,53.34 151.13,71.12 158.75,71.12 116.586,73.152 137.668,79.502 151.13,83.82 158.75,83.82 123.952,87.122 163.83,88.9 167.64,88.9 139.7,93.218 148.59,93.218 158.496,93.218 110.49,97.79 156.21,100.33 160.782,105.918 147.32,107.95 156.21,109.22 124.206,110.49 147.32,114.3 163.83,114.3 140.462,119.888
  other v2: 140.44,102.34 141.64,102.34 142.84,102.34 144.04,102.34 140.44,103.54 141.64,103.54 142.84,103.54 144.04,103.54 140.44,104.74 141.64,104.74 142.84,104.74 144.04,104.74 140.44,105.94 141.64,105.94 142.84,105.94 144.04,105.94
Net*1_3: *1.3 C20.2 L1.2 R13.1 R14.1 | length 18.3
  Top Layer w0.254: *1.3 149.225,115.697 149.94,114.982 C20.2 ; L1.2 R14.1
Net*1_6: *1.6 C19.2 R11.1 R12.1 | length 14.1
  Top Layer w0.254: C19.2 145.034,114.982 145.716,114.982 146.304,115.57 146.304,122.301 *1.6
Net*1_9: *1.9 R10.2 | length 24
  Top Layer w0.254: *1.9@153.416,137.16 153.594,136.982 156.388,136.982 158.75,134.62 158.75,120.142 157.988,119.38 R10.2
Net*1_12: *1.12 R9.2 | length 38.5
  Top Layer w0.254: *1.12 145.364,135.458 148.082,138.176 155.836,138.176 159.204,134.808 159.204,120.196 160.02,119.38 R9.2
NetC1_2: C1.2 D7.1 R1.1 R2.2 | length 11.9
  Top Layer w0.254: R2.2 107.63,68.63 D7.1 107.63,80.418 C1.2@107.68,80.468
NetC5_1: C5.1 U3.25 | length 5
  Top Layer w0.254: U3.25 142.24,97.202 C5.1
NetC6_1: C6.1 U3.19 Y1.1 | length 13.3
  Top Layer w0.254: Y1.1 129.174,103.49 U3.19
NetC7_2: C7.2 U3.20 Y1.2 | length 13.3
  Top Layer w0.254: Y1.2 129.256,102.84 U3.20
NetC16_2: C16.2 U1.74 Y2.2 | length 11.5
  Top Layer w0.254: U1.74 135.636,69 136.056,69 137.414,70.358 137.414,75.184 Y2.2
NetC17_1: C17.1 U1.73 Y2.1 | length 12.3
  Top Layer w0.254: U1.73 136.198,68.5 137.868,70.17 137.868,75.13 Y2.1
NetD1_2: D1.2 R3.1 | length 5.3
  Top Layer w1: D1.2 R3.1
NetR9_1: R9.1 U3.22 | length 44.6
  Top Layer w0.254: U3.22 140.29,98.126 138.992,96.828 138.992,95.316 140.02,94.288 152.454,94.288 159.204,101.038 159.204,112.976 160.02,113.792 R9.1
NetR10_1: R10.1 U3.23 | length 43.1
  Top Layer w0.254: U3.23 140.94,98.134 139.446,96.64 139.446,95.504 140.208,94.742 152.266,94.742 158.75,101.226 158.75,113.03 157.988,113.792 R10.1
NULL_A: P3.31 U1.18 | length 118.4
  Top Layer w0.254: v1(110.49,59.944) 116.078,59.944 117.134,61 U1.18 ; v1(130.81,93.218) 131.826,92.202 159.004,92.202 162.214,95.412 162.214,107.604 166.37,111.76 P3.31
  Bottom Layer w0.254: v1(110.49,59.944) 108.966,61.468 108.966,66.802 111.122,68.958 111.122,82.166 122.174,93.218 127,93.218 128.016,94.234 129.794,94.234 v1(130.81,93.218)
NULL_B: P3.30 U1.17 | length 113.9
  Top Layer w0.254: v1(111.76,61.214) 111.96,61.014 116.506,61.014 116.992,61.5 U1.17 ; v1(128.778,93.218) 128.778,92.964 129.994,91.748 159.192,91.748 162.668,95.224 162.668,105.518 166.37,109.22 P3.30
  Bottom Layer w0.254: v1(111.76,61.214) 110.146,61.214 109.42,61.94 109.42,66.614 111.576,68.77 111.576,81.978 122.308,92.71 125.476,92.71 128.016,92.71 128.524,93.218 v1(128.778,93.218)
NULL_C: P3.29 U1.92 | length 78.1
  Top Layer w0.254: U1.92 125.023,71.073 125.023,85.053 131.264,91.294 159.38,91.294 163.122,95.036 163.122,103.432 166.37,106.68 P3.29
NULL_D: P3.28 U1.91 | length 75.4
  Top Layer w0.254: U1.91 125.523,71.073 125.523,84.911 131.452,90.84 159.568,90.84 163.576,94.848 163.576,101.346 166.37,104.14 P3.28
NULL_E: P3.27 U1.90 | length 72.6
  Top Layer w0.254: U1.90 126.023,71.073 126.023,84.769 131.64,90.386 159.756,90.386 164.084,94.714 164.084,99.314 166.37,101.6 P3.27
NULL_F: P3.26 U1.89 | length 68.3
  Top Layer w0.254: U1.89 126.523,71.073 126.523,84.627 131.828,89.932 159.944,89.932 167.37,97.358 169.072,99.06 P3.26
NULL_G: P3.25 U1.88 | length 66.7
  Top Layer w0.254: U1.88 127,84.462 132.016,89.478 160.132,89.478 165.088,94.434 167.174,96.52 P3.25
NULL_H: P3.24 U1.87 | length 64.7
  Top Layer w0.254: U1.87@127.477,71.374 127.477,84.297 132.204,89.024 160.32,89.024 165.276,93.98 P3.24
PGEC1: P1.5 U1.27 | length 44
  Top Layer w0.254: v1(120.396,48.514) 120.396,52.712 121.5,53.816 U1.27
  Bottom Layer w0.254: P1.5 104.394,68.326 104.394,57.856 105.464,56.786 105.464,54.302 109.22,50.546 119.006,50.546 120.396,49.156 v1(120.396,48.514)
PGED1: P1.4 U1.26 | length 45.4
  Top Layer w0.254: v1(119.38,46.99) 119.38,52.832 121,54.452 U1.26
  Bottom Layer w0.254: P1.4 103.498,68.58 103.94,68.138 103.94,55.184 109.032,50.092 118.818,50.092 119.38,49.53 v1(119.38,46.99)
POS_A: P3.55 U1.68 | length 62.4
  Top Layer w0.254: U1.68 138.376,66 140.37,67.994 143.802,71.426 143.802,80.048 v1(147.574,83.82)
  Bottom Layer w0.254: v1(147.574,83.82) 147.574,86.706 148.155,87.286 148.155,87.315 157.144,96.304 157.172,96.304 158.912,98.044 164.592,98.044 168.656,93.98 P3.55
POS_B: P3.56 U1.69 | length 61.6
  Top Layer w0.254: U1.69 138.234,66.5 139.916,68.182 143.348,71.614 143.348,81.372 v1(145.796,83.82)
  Bottom Layer w0.254: v1(145.796,83.82) 145.796,85.57 147.701,87.474 147.701,87.503 156.956,96.758 158.75,98.552 167.64,98.552 169.672,96.52 P3.56
POS_C: P3.57 U1.70 | length 60.7
  Top Layer w0.254: U1.70 138.092,67 139.462,68.37 142.894,71.802 142.894,80.825 142.894,82.696 v1(144.018,83.82)
  Bottom Layer w0.254: v1(144.018,83.82) 144.018,84.434 147.247,87.662 147.247,87.691 156.768,97.212 158.616,99.06 P3.57
POS_D: P3.58 U1.71 | length 62.1
  Top Layer w0.254: U1.71 137.95,67.5 139.008,68.558 142.44,71.99 142.44,83.62 v1(142.24,83.82)
  Bottom Layer w0.254: v1(142.24,83.82) 144.742,86.322 145.264,86.322 146.793,87.851 146.793,87.879 156.58,97.666 160.514,101.6 166.37,101.6 P3.58
POS_E: P3.59 U1.79 | length 65.5
  Top Layer w0.254: U1.79@131.477,70.799 131.477,82.619 133.604,84.746 133.604,85.744 133.423,85.925 v1(133.604,86.106)
  Bottom Layer w0.254: v1(133.604,86.106) 134.274,86.776 145.076,86.776 146.339,88.039 146.339,88.067 156.392,98.12 162.412,104.14 166.37,104.14 P3.59
POS_F: P3.60 U1.80 | length 67.1
  Top Layer w0.254: U1.80@131.023,71.12 131.023,81.627 131.023,83.525 v1(132.461,84.963)
  Bottom Layer w0.254: v1(132.461,84.963) 132.461,86.487 133.204,87.23 134.086,87.23 144.888,87.23 145.885,88.227 145.885,88.255 156.204,98.574 164.31,106.68 166.37,106.68 P3.60
POS_G: P3.61 U1.47 | length 125.8
  Top Layer w0.254: U1.47 131.5,52.65 v1(132.588,51.562)
  Bottom Layer w0.254: v1(132.588,51.562) 131.318,50.292 120.544,50.292 119.274,51.562 116.332,51.562 113.284,54.61 113.284,62.125 114.3,63.141 114.3,80.85 123.382,89.932 141.48,89.932 148.976,97.428 149.03,97.482 149.058,97.482 153.508,101.932 157.04,105.464 ; 157.033,105.471 160.782,109.22 P3.61
POS_H: P3.62 U1.48 | length 130.3
  Top Layer w0.254: U1.48 132,53.928 133.604,52.324 v1(133.604,50.038)
  Bottom Layer w0.254: v1@133.477,49.911 133.404,49.838 120.356,49.838 119.086,51.108 116.144,51.108 112.83,54.422 112.83,62.313 113.846,63.329 113.846,81.038 123.194,90.386 141.292,90.386 148.788,97.882 148.842,97.936 148.87,97.936 153.054,102.12 156.579,105.645 156.579,105.659 156.96,106.04 162.68,111.76 P3.62
R/W: P4.2 U1.7 | length 69
  Top Layer w0.254: v1(112.014,103.886) 112.014,102.87 113.763,101.121 113.763,69.165 113.754,69.156 113.754,68.499 115.753,66.5 U1.7
  Bottom Layer w0.254: P4.2 102.87,123.19 105.41,123.19 112.014,116.586 v1(112.014,103.886)
RBIAS: R15.2 U3.10 | length 5.3
  Top Layer w0.254: R15.2 142.89,111.348 U3.10
RESET: P1.1 R2.1 U1.13 | length 25.2
  Top Layer w0.254: P1.1 105.664,60.96 107.95,63.246 ; R2.1 105.68,66.278 107.95,64.008 107.95,63.246 ; U1.13 112.776,63.5 112.522,63.246 v1(111.76,63.246) 107.95,63.246
SPI_SCK: P2.2 U1.55 | length 81.2
  Top Layer w0.254: v1(112.268,45.466) 112.776,44.958 150.182,44.958 151.384,46.16 151.384,57.926 150.128,59.182 141.866,59.182 141.571,59.477 134.573,59.477 U1.55
  Bottom Layer w0.254: P2.2 105.156,45.466 v1(112.268,45.466)
SPI_SDI: P2.3 U1.54 | length 80
  Top Layer w0.254: v1(113.284,46.99) 113.284,46.482 114.354,45.412 149.994,45.412 150.93,46.348 150.93,57.738 149.994,58.674 141.732,58.674 141.406,59 U1.54
  Bottom Layer w0.254: P2.3 104.14,46.99 v1(113.284,46.99)
SPI_SDO: P2.4 U1.53 | length 79.4
  Top Layer w0.254: v1(114.3,48.514) 114.3,46.482 114.916,45.866 149.806,45.866 150.476,46.536 150.476,57.55 149.86,58.166 141.478,58.166 141.167,58.477 134.573,58.477 U1.53
  Bottom Layer w0.254: P2.4 103.124,48.514 v1(114.3,48.514)
SPI_SS: P2.5 U1.23 | length 27.5
  Top Layer w0.254: v1(116.332,48.514) 116.332,49.904 116.786,50.358 116.786,57.604 117.682,58.5 U1.23
  Bottom Layer w0.254: P2.5 104.14,49.53 115.316,49.53 v1(116.332,48.514)
SYS_CLK: U1.63 U3.27 | length 119.1
  Top Layer w0.254: U1.63 138.952,63.5 139.46,62.992 140.462,62.992 140.97,63.5 140.97,66.548 145.18,70.758 145.18,74.06 146.812,75.692 146.812,77.216 v1@146.558,77.47 ; U3.27 143.54,100.18 145.148,98.572 150.348,98.572 v1(151.384,97.536)
  Bottom Layer w0.254: v1(146.812,77.47) 146.14,77.47 145.178,76.508 144.339,76.508 139.567,81.28 133.991,81.28 133.988,81.277 130.934,81.277 130.931,81.28 129.046,81.28 122.042,74.276 116.972,74.276 115.678,75.57 115.678,81.586 123.57,89.478 141.668,89.478 149.218,97.028 149.606,97.028 151.384,97.028 v1@150.876,97.536
TP_IN_N: *1.7 R11.2 U3.8 | length 35.6
  Top Layer w0.254: v1@141.097,124.333 141.097,123.571 138.522,120.996 138.522,114.342 139.126,113.738 143.19,113.738 144.19,112.738 U3.8 ; *1.7 144.145,121.285 145.034,120.396 R11.2
  Bottom Layer w0.254: v1(140.97,124.46) 142.24,125.73 *1.7
TP_IN_P: *1.8 R12.2 U3.9 | length 31.1
  Top Layer w0.254: v1(139.446,123.444) 138.068,122.066 138.068,114.154 138.938,113.284 143.002,113.284 143.54,112.746 143.54,108.682 U3.9 ; *1.8 142.875,117.459 R12.2
  Bottom Layer w0.254: v1(139.446,123.444) 139.7,123.19 *1.8
TPOUT1_N: *1.2 R13.2 U3.12 | length 43.1
  Top Layer w0.254: U3.12 141.59,107.838 140.596,108.832 138.056,108.832 137.614,109.274 137.614,111.814 137.614,123.136 141.532,127.054 149.799,127.054 150.495,126.358 *1.2 150.622,123.063 R13.2
TPOUT1_P: *1.1 R14.2 U3.13 | length 45.1
  Top Layer w0.254: U3.13 140.94,107.726 140.288,108.378 137.868,108.378 137.16,109.086 137.16,123.324 141.344,127.508 149.987,127.508 *1.1 151.765,120.523 152.654,119.634 R14.2
VCC: C48.1 C49.1 C50.1 C51.1 C52.1 C53.1 C54.1 D1.1 D7.2 L1.1 P1.2 P2.1 P4.19 R1.2 U1.2 U1.16 U1.30 U1.37 U1.46 U1.62 U1.86 U3.11 U3.15 U3.16 U3.21 U3.24 U8.4 | length 322
  Top Layer w0.254: 104.14,63.5 104.14,72.433 D7.2 ; D7.2@105.68,74.073 R1.2 ; v1@116.674,69 U1.2 ; U1.16 v1(121.92,62) ; U1.30 123,56.875 v1(123,58.42) ; U1.37 v1(126.5,58.42) ; v1@126.912,69 128,70.088 U1.86 ; U1.46 v1(131,58.42) ; v1@131.58,63 v1(132.08,63) U1.62 ; v1(137.16,100.33) 137.505,100.33 U3.21 ; U3.16 137.384,105.44 137.16,105.664 v1(137.16,106.68) 137.75,106.09 U3.15 ; v1(140.97,96.52) 141.59,97.14 U3.24 ; v1@141.986,109.982 142.24,109.728 U3.11 ; v1(152.654,109.22) L1.1
  Top Layer w1: P2.1@101.6,39.33 104.14,39.33 ; P1.2 104.14,63.5 v1(106.426,63.5) ; v1(115.062,56.388) v1(106.426,56.388) 104.14,56.388 104.14,39.33 ; C52.1 135.208,98.378 v1(137.16,100.33) ; C53.1 135.462,108.378 v1(137.16,106.68) ; C48.1 146.7,39.33 134.04,26.67 121.38,39.33 104.14,39.33
  Bottom Layer w0.254: 121.832,69.088 121.92,69 ; v1(123,58.42) 121.92,59.5 v1(121.92,62) 121.92,69 ; v1(126.746,68.834) 126.58,69 121.92,69 ; v1(131,58.42) 131.08,58.5 131.08,62 v1(132.08,63)
  Bottom Layer w1: P4.19 105.41,106.68 106.426,105.664 v1(106.426,63.5) v1(106.426,56.388) ; 106.934,95.504 132.334,95.504 v1(137.16,100.33) ; v1(115.062,56.388) 120.968,56.388 v1(123,58.42) ; v1(116.586,69.596) 117.094,69.088 121.832,69.088 ; v1(140.97,96.52) v1(137.16,100.33) ; C48.1 156.21,34.25 D1.1 ; v1(152.654,109.22) 151.638,110.236 v1(141.732,110.236) 141.732,111.252 140.716,112.268 138.684,112.268 137.16,110.744 v1(137.16,106.68) v1(137.16,100.33)
VDD_CORE: C3.2 U1.85 | length 5
  Top Layer w0.254: v1(128.5,68.858) U1.85
  Bottom Layer w0.254: C3.2@128.444,71.628 128.5,71.572 v1(128.5,68.858)
pads on no net: *1.4 *1.5 *1.15 *1.16 D7.3 P1.6 P4.7 P4.9 U1.19 U1.28 U1.49 U1.64 U3.1
copper on no net:
  other v1: 118.11,80.01

## Polygon pours and split planes (outlines as drawn)
GND on Top Layer "Top Layer-No Net" (solid, pour order 1000): 139.365,105.044 134.732,105.044 133.858,105.918 133.858,107.95 133.858,108.204 132.842,109.22 124.46,109.22 123.19,107.95 123.19,98.298 124.46,97.028 132.842,97.028 133.858,98.044 133.858,100.584 135.382,102.108 135.464,102.19 139.365,102.19
GND on Top Layer "Top Layer-No Net" (solid, pour order 1001): 133.35,69.85 133.35,80.01 134.366,81.026 140.462,81.026 140.716,81.026 141.732,80.01 141.732,72.39 137.668,68.326 133.604,68.326 133.35,68.326
GND on Top Layer "Top Layer-No Net" (solid, pour order 1002): 118.364,72.136 118.364,54.864 135.636,54.864 135.636,72.136
GND on Top Layer "Top Layer-No Net" (solid, remove dead copper, pour order 1003): 96.52,139.7 177.8,139.7 177.8,116.84 170.18,116.84 170.18,30.48 177.8,30.48 177.8,15.24 96.52,15.24
VCC on Top Layer "Bottom Layer-No Net" (solid, remove dead copper, pour order 1000): 111.76,38.1 114.3,40.64 144.78,40.64 147.32,38.1 147.32,20.32 144.78,17.78 114.3,17.78 111.76,20.32
GND on Bottom Layer "Top Layer-No Net" (solid, pour order 1004): 133.35,80.01 134.366,81.026 140.716,81.026 141.732,80.01 141.732,72.39 137.668,68.326 133.35,68.326
VCC on Bottom Layer "Top Layer-No Net" (solid, remove dead copper, pour order 1005): 118.282,72.193 118.282,54.864 135.636,54.864 135.636,72.193
GND on Bottom Layer "Top Layer-No Net" (solid, remove dead copper, pour order 1006): 96.52,139.7 96.52,15.24 177.8,15.24 177.8,30.48 170.18,30.48 170.18,116.84 177.8,116.84 177.8,139.7
GND on Internal Plane 1 (split plane): 177.29,117.35 170.688,117.35 170.588,117.341 170.493,117.312 170.404,117.264 170.327,117.201 170.264,117.124 170.216,117.035 170.187,116.94 170.178,116.84 170.178,114.3 170.187,114.2 170.216,114.105 170.264,114.016 170.327,113.939 170.404,113.876 170.493,113.828 170.588,113.799 170.688,113.79 178.605,113.79 179.83,112.565 179.83,34.755 178.605,33.53 170.688,33.53 170.588,33.521 170.493,33.492 170.404,33.444 170.327,33.381 170.264,33.304 170.216,33.215 170.187,33.12 170.178,33.02 170.178,30.48 170.187,30.38 170.216,30.285 170.264,30.196 170.327,30.119 170.404,30.056 170.493,30.008 170.588,29.979 170.688,29.97 177.29,29.97 177.29,15.75 97.03,15.75 97.03,139.19 177.29,139.19

## Silkscreen, mask and mechanical layers (free items; w line width, h text height)
Top Overlay:
  lines w0.254: 96.52,12.446 96.52,12.954 ; 98.044,12.192 96.52,12.7 ; 98.044,13.208 96.52,12.7 ; 130.025,12.7 96.52,12.7 ; 144.295,12.7 177.8,12.7 ; 176.276,12.192 177.8,12.7 ; 176.276,13.208 177.8,12.7 ; 177.8,12.446 177.8,12.954 ; 182.372,16.764 182.88,15.24 ; 182.372,138.176 182.88,139.7 ; 182.626,15.24 183.134,15.24 ; 182.626,139.7 183.134,139.7 ; 182.88,69.573 182.88,15.24 ; 182.88,85.367 182.88,139.7 ; 183.388,16.764 182.88,15.24 ; 183.388,138.176 182.88,139.7
  text "124.46 (mm)" at 183.794,69.827 h1.52 r90
  text "81.28 (mm)" at 130.279,11.786 h1.52

## Text inside footprints (layer, text, board x,y; h text height)
C47: Top Overlay "+" at 158,41.38 h1.5 r270
C48: Top Overlay "+" at 150.38,41.38 h1.5 r270
P4: Top Overlay "1" at 100.584,129.032 h1.27 r270; Top Overlay "1" at 103.632,130.048 h1.27 r270; Top Overlay "1" at 103.632,129.032 h1.27 r270; Top Overlay "10" at 101.092,102.616 h1.27 r270; Top Overlay "20" at 103.632,102.616 h1.27 r270